# EAGLE board 210_gpio (EAGLE 7.6.0)
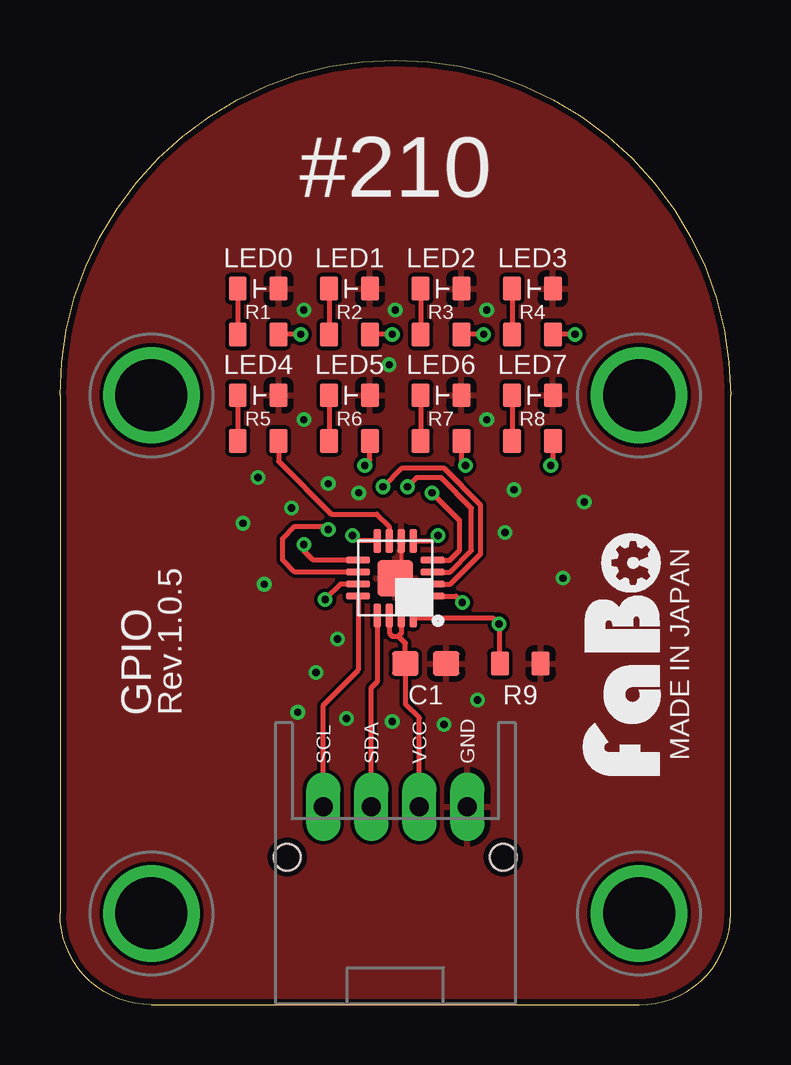
[diagram p0: board, top side]
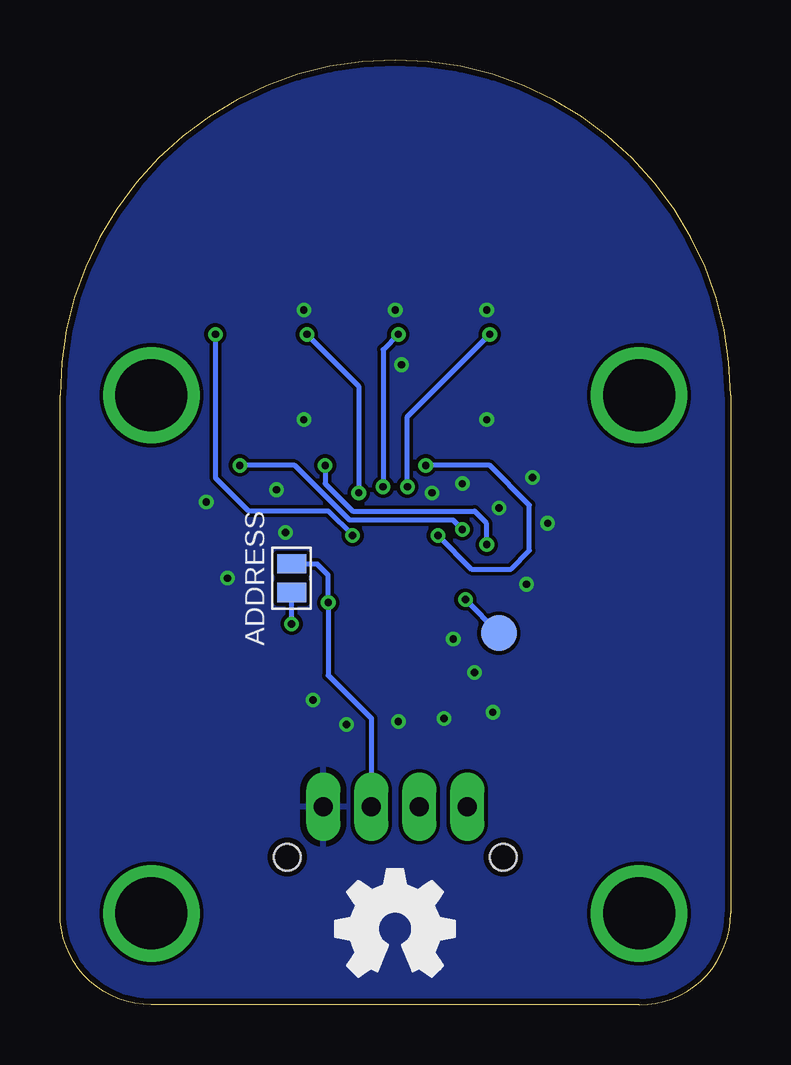
[diagram p1: board, bottom side, seen from below]

Size 27.94 x 39.37 mm. Coordinates in mm from the lower left corner, seen from the top.
Copper layers (1*16): Top 0.035mm / dielectric 1.5mm / Bottom 0.035mm
Design rules "SeeedStudio_2layer_DRU_no_angle_20140221": minimum track width 6mil, minimum drill 12mil, track to track 6mil, track to pad 6mil, pad to pad 6mil, via to via 6mil, smd to smd 0mil, copper to edge 10mil, drill to drill 10mil, minimum pad ring 10mil, minimum via ring 6mil, stop-mask expansion 2mil, vias tented up to drill 100mil, thermal gap 10mil

## Footprints (pad centres in the part's own frame; a part is rotated, then mirrored left to right if it is on the bottom)
0603 = smd 1.1 x 1: 1 -0.85,0; 2 0.85,0
NXP-PCAL6408A = smd 1 x 0.3: 1 -1.55,0.75; 2 -1.55,0.25; 3 -1.55,-0.25; 4 -1.55,-0.75; 9 1.55,-0.75; 10 1.55,-0.25; 11 1.55,0.25; 12 1.55,0.75 | smd 0.3 x 1: 5 -0.75,-1.55; 6 -0.25,-1.55; 7 0.25,-1.55; 8 0.75,-1.55; 13 0.75,1.55; 14 0.25,1.55; 15 -0.25,1.55; 16 -0.75,1.55 | smd 1.5 x 1.5: 17 0,0
FABO_BRICK_I2C = drill 0.8 pad 1.422 long: GND 3,-10.795; SCL -3,-10.795; SDA -1,-10.795; VCC 1,-10.795 | drill 3 pad 3.81: P$1 -10.16,6.35; P$2 10.16,6.35; P$3 -10.16,-15.24; P$4 10.16,-15.24 | hole 1.1: -4.5,-12.895; 4.5,-12.895
0603-NARROW = smd 0.75 x 1: ANODE -0.85,0; CATHODE 0.85,0
0603-NARROW' = smd 0.75 x 1: 1 -0.85,0; 2 0.85,0
SMD-JUMPER-2-OPEN = smd 0.8 x 1.2: 1 -0.6,0; 2 0.6,0
TP-15 = smd 1.5 x 1.5: 1 0,0

## Placement (x,y rotation side)
C1  0.1uF  [0603]  15.24,14.22 180 top
IC1  [NXP-PCAL6408A]  13.97,17.78 180 top
J1  [FABO_BRICK_I2C]  13.97,19.05 0 top
LED0  [0603-NARROW]  8.26,29.84 0 top
LED1  [0603-NARROW]  12.06,29.84 0 top
LED2  [0603-NARROW]  15.88,29.84 0 top
LED3  [0603-NARROW]  19.68,29.84 0 top
LED4  [0603-NARROW]  8.26,25.4 0 top
LED5  [0603-NARROW]  12.06,25.4 0 top
LED6  [0603-NARROW]  15.88,25.4 0 top
LED7  [0603-NARROW]  19.68,25.4 0 top
R1  [0603-NARROW']  8.26,27.94 180 top
R2  [0603-NARROW']  12.06,27.94 180 top
R3  [0603-NARROW']  15.88,27.94 180 top
R4  [0603-NARROW']  19.68,27.94 180 top
R5  [0603-NARROW']  8.26,23.5 180 top
R6  [0603-NARROW']  12.06,23.5 180 top
R7  [0603-NARROW']  15.88,23.5 180 top
R8  [0603-NARROW']  19.68,23.5 180 top
R9  10k  [0603-NARROW']  19.18,14.22 180 top
SJ1  OPEN  [SMD-JUMPER-2-OPEN]  18.29,17.78 270 bottom
TP1  [TP-15]  9.65,15.49 0 bottom
U$2  [LOGO_OSHW_M_BOTTOM]  13.97,3.17 0 top
U$4  [LOGO_FABO_MS]  25.4,14.61 90 top

## Library data of the parts
C1 = FaBo-Capacitor
IC1 = FaBo-Mems
J1 = FaBo-Template
LED0 LED1-LED7 = FaBo-LED
R1-R9 = FaBo-Resistors
SJ1 TP1 = FaBo-Supply
U$2 U$4 = FaBo-etc

## Nets
5V: C1.2 IC1.1 IC1.14 IC1.15 J1.VCC SJ1.1
ADDRESS: IC1.16 R9.2 SJ1.2
GND: C1.1 IC1.6 IC1.17 J1.GND LED0.CATHODE LED1.CATHODE LED2.CATHODE LED3.CATHODE LED4.CATHODE LED5.CATHODE LED6.CATHODE LED7.CATHODE R9.1
GPIO0: IC1.2 R1.1
GPIO1: IC1.3 R2.1
GPIO2: IC1.4 R3.1
GPIO3: IC1.5 R4.1
GPIO4: IC1.7 R5.1
GPIO5: IC1.8 R6.1
GPIO6: IC1.9 R7.1
GPIO7: IC1.10 R8.1
INT: IC1.11 TP1.1
N$1: LED0.ANODE R1.2
N$2: LED1.ANODE R2.2
N$3: LED2.ANODE R3.2
N$4: LED3.ANODE R4.2
N$5: LED4.ANODE R5.2
N$6: LED5.ANODE R6.2
N$7: LED6.ANODE R7.2
N$8: LED7.ANODE R8.2
SCL: IC1.12 J1.SCL
SDA: IC1.13 J1.SDA

## Tracks (layer width: path | path; a pad name or v marks a point on that pad's centre or on a via)
5V  (via drill 0.3)
  Top 0.203: IC1.14 13.72,15.49 13.84,15.37 14.1,15.37 | IC1.15 14.22,15.49 14.1,15.37 | 14.1,15.37 14.39,15.07 C1.2 14.39,12.53 14.97,11.95 J1.VCC | IC1.1 16.5,17.03 v16.76,16.76
  Bottom 0.203: SJ1.1 17.24,18.38 16.76,17.91 v16.76,16.76 16.76,13.73 14.97,11.94 J1.VCC
ADDRESS  (via drill 0.3)
  Top 0.203: 18.06,16.1 v18.29,15.88 | R9.2 18.33,15.84 v18.29,15.88 | IC1.16 14.72,16.14 14.73,16.13 18.03,16.13 v18.29,15.88
  Bottom 0.203: v18.29,15.88 SJ1.2
GND  (via drill 0.3)
  Top 0.152: IC1.6 14.22,18.03 IC1.17
  other vias: 17.78,24.38 17.78,28.96 12.45,21.34 13.72,26.67 10.16,24.38 13.97,28.96 10.16,28.96 8.26,21.97 9.65,20.7 11.18,21.72 8.51,17.53 7.62,20.07 11.56,15.24 18.54,19.68 21.84,20.95 11.94,11.94 13.84,11.81 16,11.68 9.91,12.19 18.92,21.46 20.95,17.78 17.4,12.7 10.67,13.84
  pour Top: 0,0 27.94,0 27.94,39.37 0,39.37
  pour Bottom: 0,0 27.94,0 27.94,39.37 0,39.37
GPIO0  (via drill 0.3)
  Top 0.203: IC1.2 16.26,17.53 17.53,18.8 17.53,20.83 16,22.35 14.22,22.35 v13.46,21.59 | v10.03,27.94 R1.1
  Bottom 0.203: v13.46,21.59 13.46,24.51 v10.03,27.94
GPIO1  (via drill 0.3)
  Top 0.203: IC1.3 16.25,18.03 17.14,18.92 17.14,20.7 15.88,21.97 14.86,21.97 v14.48,21.59 | v13.84,27.94 R2.1
  Bottom 0.203: v13.84,27.94 14.48,27.3 v14.48,21.59
GPIO2  (via drill 0.3)
  Top 0.203: IC1.4 16.24,18.53 16.64,18.92 16.64,20.19 v15.49,21.34 | v17.65,27.94 R3.1
  Bottom 0.203: v17.65,27.94 15.49,25.78 v15.49,21.34
GPIO3  (via drill 0.3)
  Top 0.203: IC1.5 15.52,19.33 v15.75,19.56 | v21.46,27.94 R4.1
  Bottom 0.203: v15.75,19.56 16.76,20.57 20.07,20.57 21.46,21.97 v21.46,27.94
GPIO4
  Top 0.203: IC1.7 13.72,19.94 13.21,20.45 11.3,20.45 9.11,22.64 R5.1
GPIO5  (via drill 0.3)
  Top 0.203: IC1.8 12.42,19.33 v12.19,19.56 | v12.7,22.48 12.91,22.69 R6.1
  Bottom 0.203: v12.19,19.56 10.79,18.16 9.14,18.16 8.38,18.92 8.38,20.83 10.03,22.48 v12.7,22.48
GPIO6  (via drill 0.3)
  Top 0.203: IC1.9 10.55,18.53 10.16,18.92 v10.16,19.18 | R7.1 16.73,22.64 v16.89,22.48
  Bottom 0.203: v10.16,19.18 10.16,20.07 10.67,20.57 15.75,20.57 16.89,21.72 v16.89,22.48
GPIO7  (via drill 0.3)
  Top 0.203: IC1.10 9.78,18.03 9.27,18.54 9.27,19.43 9.78,19.94 11.05,19.94 v11.18,19.81 | R8.1 20.54,22.57 v20.45,22.48
  Bottom 0.203: v20.45,22.48 18.16,22.48 15.88,20.19 11.56,20.19 v11.18,19.81
INT  (via drill 0.3)
  Top 0.203: IC1.11 11.69,17.53 v11.05,16.89
  Bottom 0.203: TP1.1 v11.05,16.89
N$1
  Top 0.203: LED0.ANODE R1.2
N$2
  Top 0.203: LED1.ANODE R2.2
N$3
  Top 0.203: LED2.ANODE R3.2
N$4
  Top 0.203: LED3.ANODE R4.2
N$5
  Top 0.203: LED4.ANODE R5.2
N$6
  Top 0.203: LED5.ANODE R6.2
N$7
  Top 0.203: LED6.ANODE R7.2
N$8
  Top 0.203: LED7.ANODE R8.2
SCL
  Top 0.203: IC1.12 12.42,13.94 10.97,12.49 J1.SCL
SDA
  Top 0.203: IC1.13 13.22,13.47 12.97,13.22 J1.SDA

## Text on the board
tPlace: #210 | MADE IN JAPAN | GPIO | Rev.1.0.5
bPlace: ADDRESS